# Altium PCB gateway2.PcbDoc
Units mm, origin at the board's own origin, x right, y up, seen from the top; angles counter-clockwise.
Board outline 61 x 52.5 mm, 2 copper layers (Top Layer, Bottom Layer); 28 components, 18 nets, 87 pads, 0 vias.
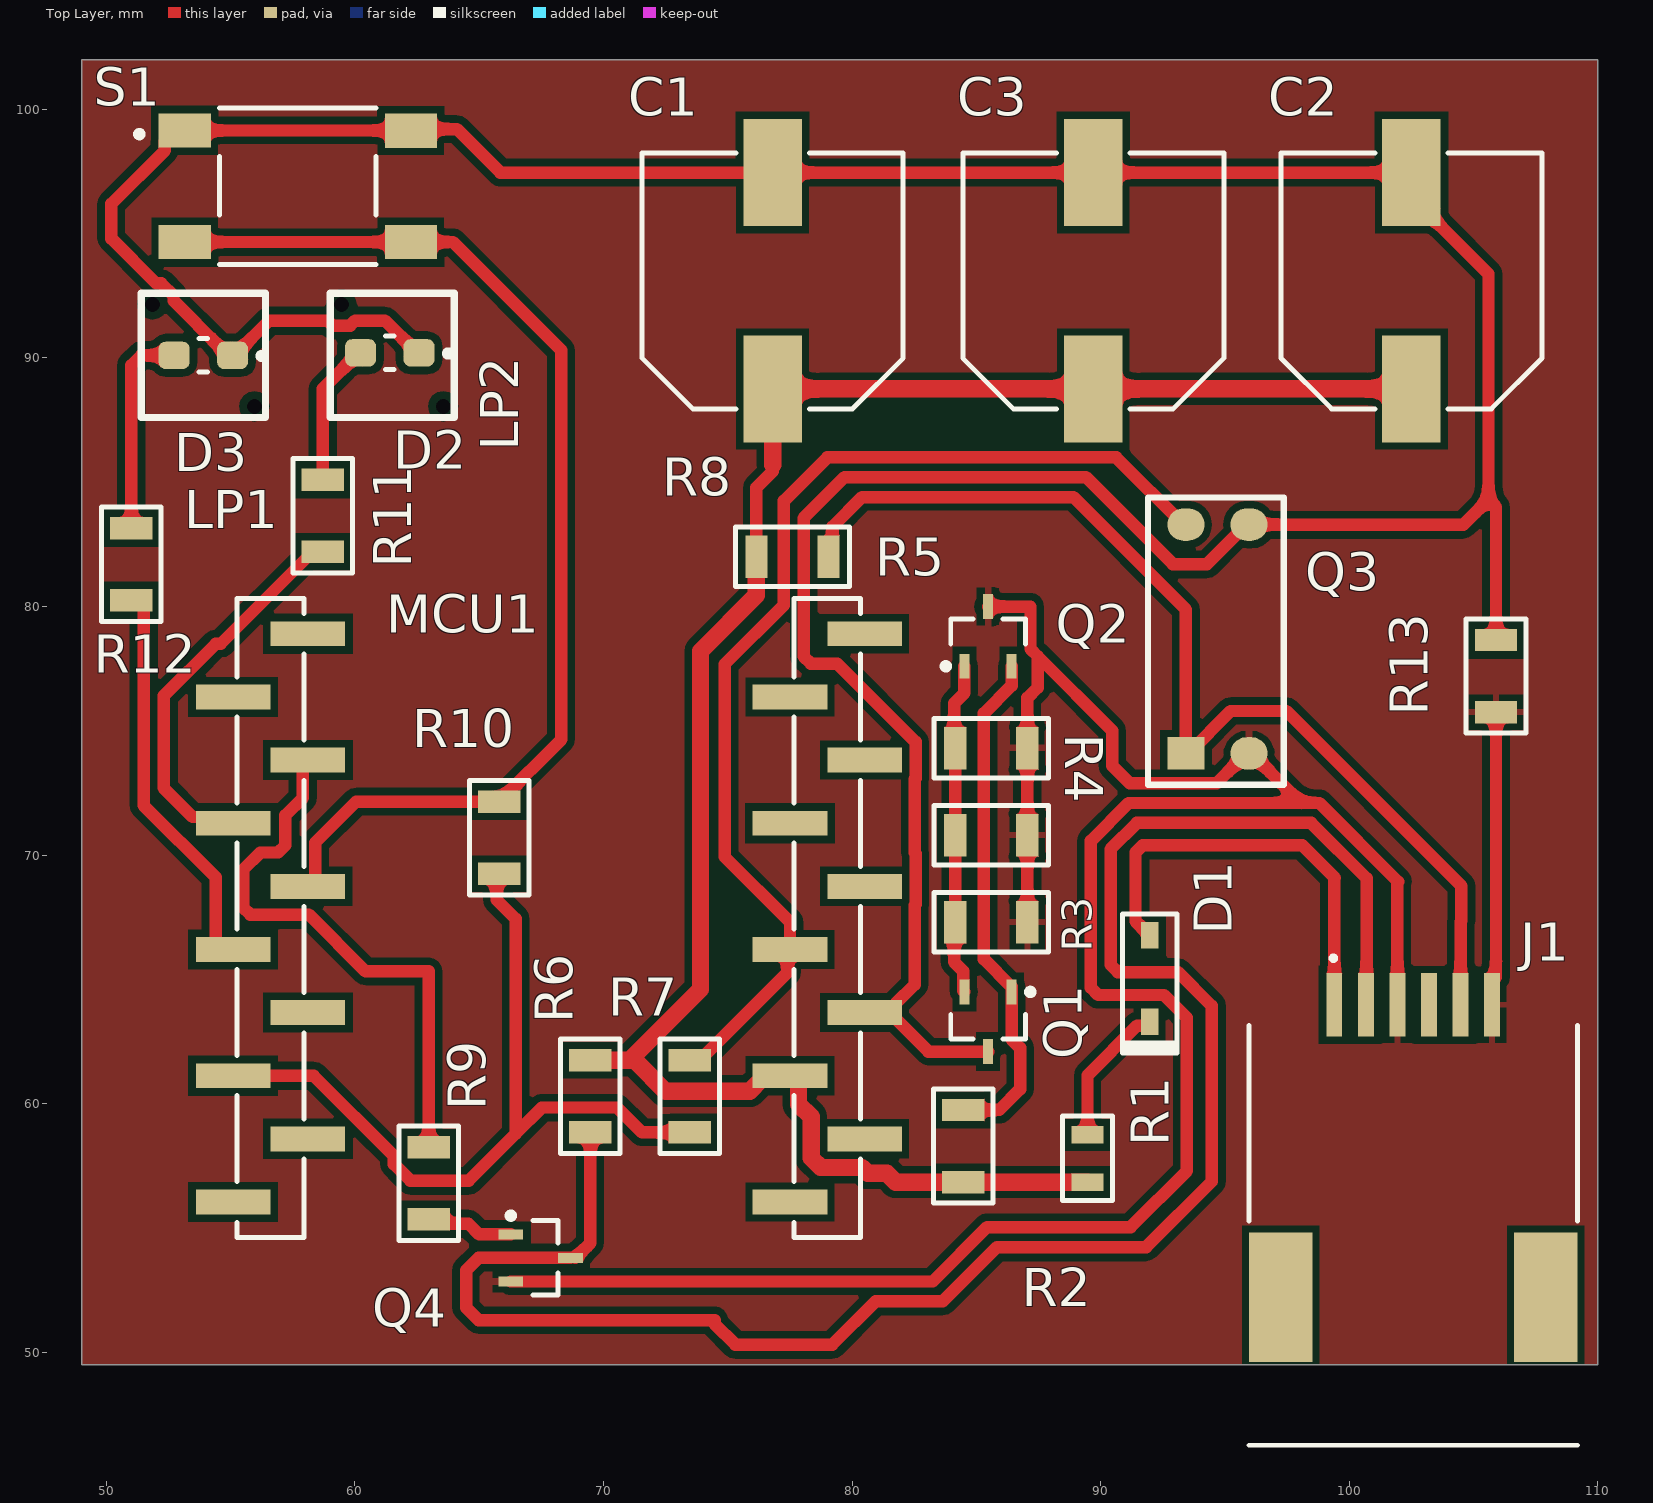
[diagram p0: Top Layer view]
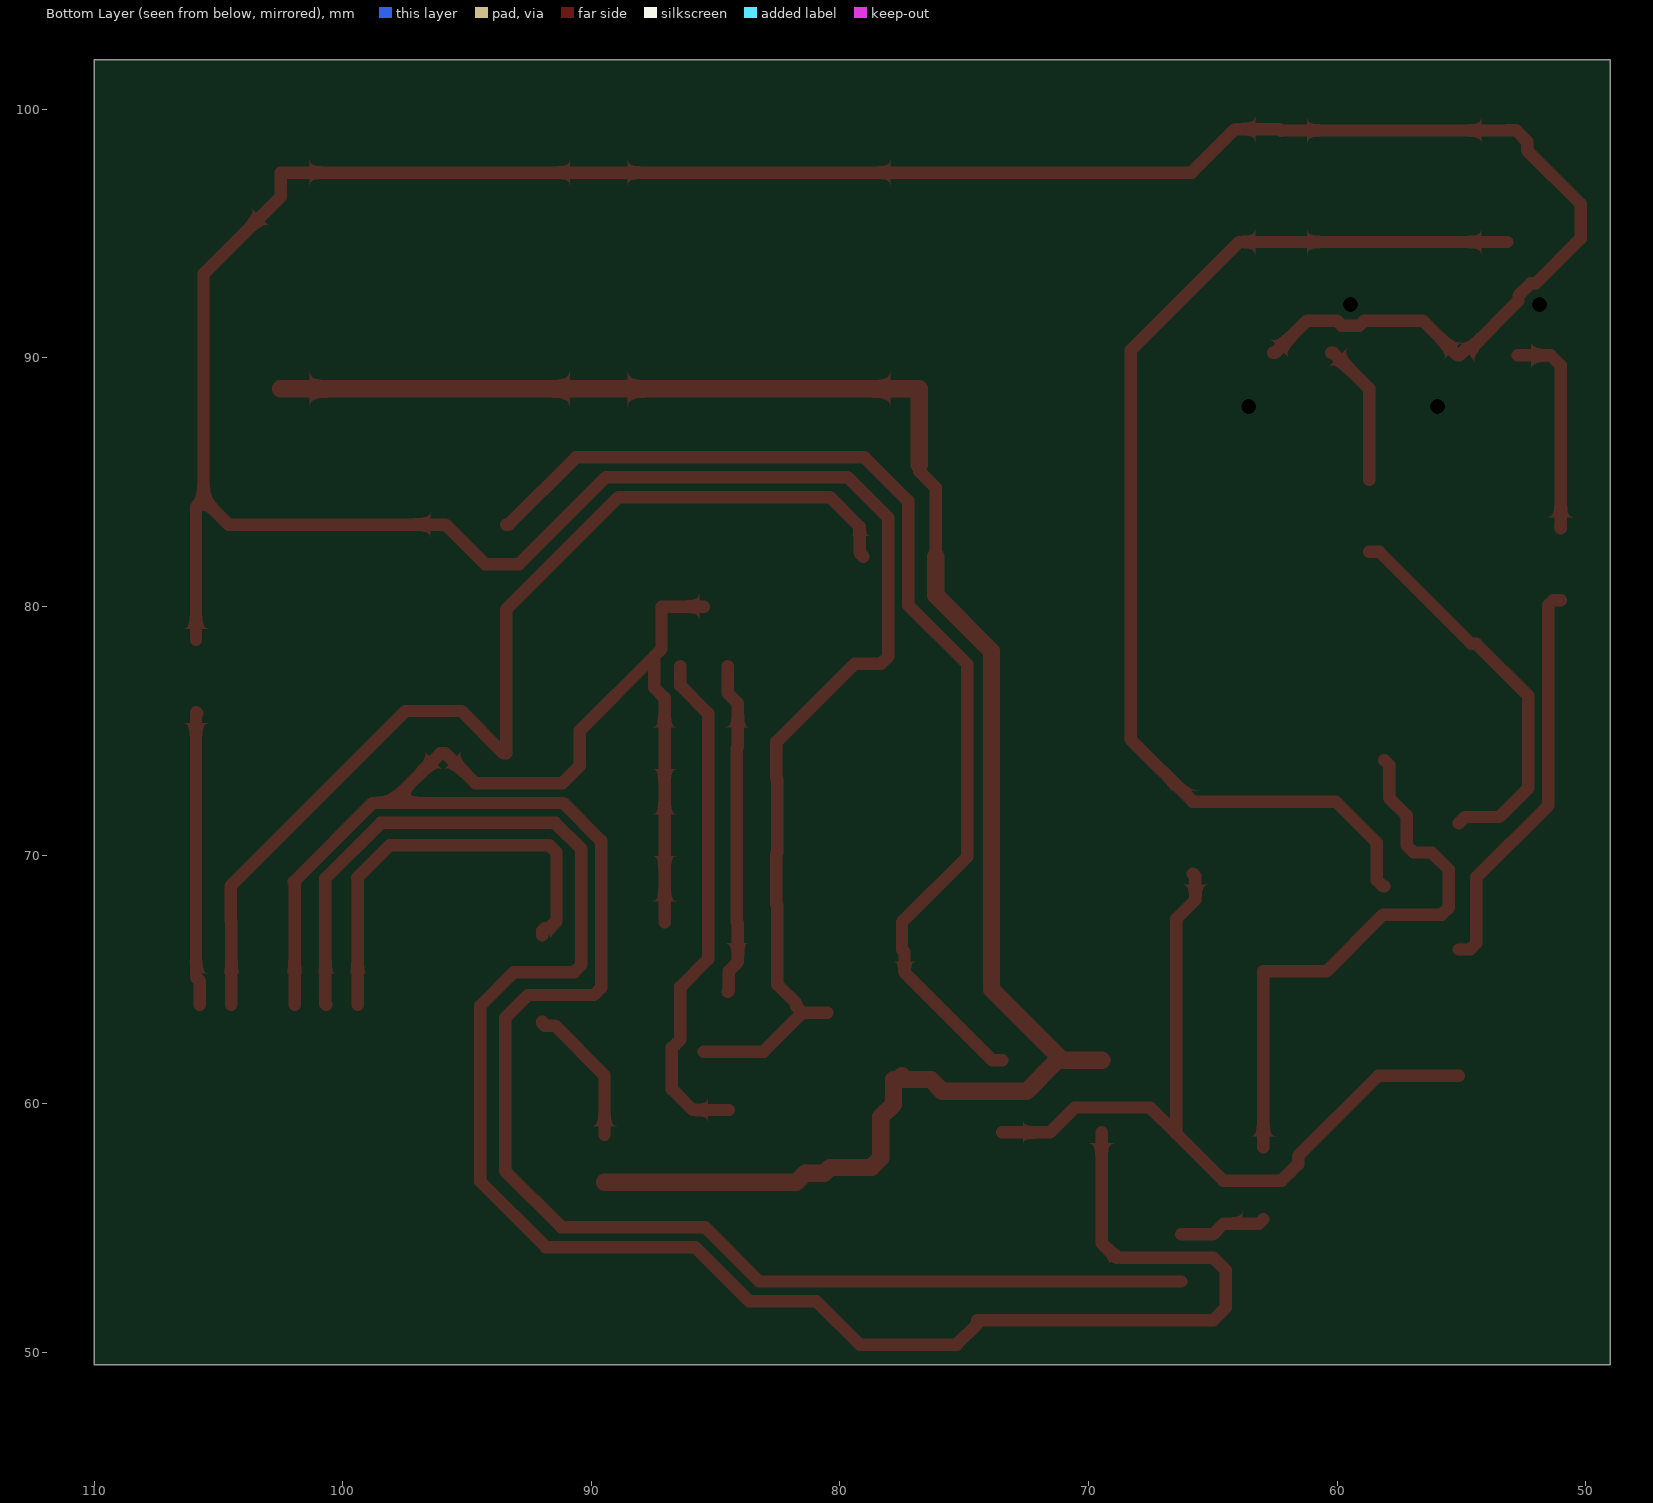
[diagram p1: Bottom Layer view, seen from below]

## Layer stack, top to bottom
Top Solder: solder mask 0.0102, Solder Resist, Dk 3.5
Top Layer: signal copper 0.0356
Dielectric 1: dielectric 0.32, FR-4, Dk 4.8
Bottom Layer: signal copper 0.0356
Bottom Solder: solder mask 0.0102, Solder Resist, Dk 3.5

## Board outline
49,49.5 49,102 110,102 110,49.5

## Design rules (kind name [scope] priority, off if disabled: settings)
Clearance [All] p1: gap=0.3 ignorepadtopadclearanceinfootprint=FALSE
PolygonConnect [All] p1: connectstyle=Relief reliefconductorwidth=0.254 reliefentries=4 polygonreliefangle="90 Angle" airgapwidth=0.254
RoutingVias [All] p1: holewidth=0.711 width=1.27 viastyle="Through Hole" minholewidth=0.711 minwidth=1.27 maxholewidth=0.711 maxwidth=1.27
SilkToSolderMaskClearance [IsPad] p1: minsilkscreentomaskgap=0.1 clearancetoexposedcopper=TRUE
SolderMaskExpansion [All] p1: expansion=0.102 istentingtop=FALSE
Width [All] p1: maxlimit=1 minlimit=0.25 preferedwidth=0.5
29 further rules are at their usual default settings.

## Components (designator, comment, footprint, x,y, rotation, side; value= is the part's Value field where it differs from the comment)
C1 "1800uF_6V3" CAPAE109103X105M_680uF 76.8,93.1 r90 top value=1800uF
C2 "1800uF_6V3" CAPAE109103X105M_680uF 102.5,93.1 r90 top value=1800uF
C3 "680uF_16V" CAPAE109103X105M_680uF 89.7,93.1 r90 top value=680uF
D1 "Schottky_SOD123" Diode_SOD-123 91.967,65.032 r270 top
D2 "red led" Kingbright_KPT-2012EC_0 61.4,90.2 r180 top
D3 "LED_green" Kingbright_KPT-2012EC_0 53.9,90.1 r180 top
J1 "RJ11_jack_6P6C" 44144-0005 102.57,63.975 r0 top
LP1 "VLP-350-R" VLP-350-R 61.5,90.1 r0 top
LP2 "VLP-350-R" VLP-350-R 53.9,90.1 r180 top
MCU1 "ESP32-MINI" PINHEADERS_SMD_10 61.6,67.57 r0 top
Q1 "NPN_MMBT100" SOT95P245X110-3N 85.467,63.292 r270 top
Q2 "NPN_MMBT100" SOT95P245X110-3N 85.467,78.792 r90 top
Q3 "Optocoupler_FOD817_SMD" FOD814_DIPSMD 95.967,74.092 r180 top
Q4 "N-channel_SOT-23" SOT95P237X110-3N 67.467,53.792 r0 top
R1 "Ptc200m_0805" R0805 89.467,57.792 r270 top value=0.2
R2 "R1k2_1206" R1206 84.467,58.292 r90 top value=1k2
R3 "R3_1206" R1206 85.6,67.3 r180 top value=3
R4 "R3_1206" R1206 85.6,70.8 r180 top value=3
R5 "R3_1206" R1206 85.6,74.3 r180 top value=3
R6 "R1k_1206" R1206 69.467,60.292 r90 top value=1k
R7 "R10k_1206" R1206 73.467,60.292 r270 top value=10k
R8 "R1k2_1206" R1206 77.6,82 r180 top value=1k2
R9 "R1k2_1206" R1206 62.967,56.792 r270 top value=1k2
R10 "R10k_1206" R1206 65.8,70.7 r270 top value=10k
R11 "R62_1206" R1206 58.7,83.65 r270 top value=62
R12 "R62_1206" R1206 51,81.7 r270 top value=62
R13 "R0_1206" R1206 105.9,77.2 r90 top value=0
S1 "FSM2JSMAA_Button" FP-FSM2JSMAA-MFG 57.7,96.9 r90 top

## Footprints (in the part's own frame and the unit in brackets; to place one, negate y for a bottom-side part, rotate by r counter-clockwise, add the part's x,y. Pads: shape width x height; smd on the part's side, far side on the other; paste and mask are expansions set on the pad)
44144-0005 [mm]
  rect 0.64x2.54 smd: 1(-3.175,0) 2(-1.905,0) 3(-0.635,0) 4(0.635,0) 5(1.905,0) 6(3.175,0)
  rect 2.54x5.21 smd: 7(-5.33,-11.775) 8(5.33,-11.775)
  silkscreen extent -6.61,-17.72 6.61,1.97, body extent -6.6,-17.4 6.6,0.99, height 11.75
CAPAE109103X105M_680uF [mm] "Aluminum Electrolytic Capacitor, Body 10,25x10,30x10,50mm, IPC Low Density"
  rect 4.3x2.35 smd: 1(-4.35,0) 2(4.35,0)
  silkscreen extent -5.15,-5.25 5.15,5.25, body extent -5.43,-5.25 5.43,5.25, height 10.5
Diode_SOD-123 [mm]
  rect 1.05x0.7 smd: A(-1.74,0) K(1.74,0)
  silkscreen extent -2.6,-1.1 3,1.1, body extent -1.95,-0.9 1.95,0.9, height 1.18
FOD814_DIPSMD [mm]
  rect 1.5x1.3 smd: 1(2.54,0)
  oval 1.5x1.3 smd: 2(0,0) 3(0,-9.2) 4(2.54,-9.2)
  silkscreen extent -1.4,-10.29 4.06,1.27, body extent -0.99,-9.6 3.59,0.4, height 3.86
FP-FSM2JSMAA-MFG [mm]
  rect 1.38x2.1 smd paste+0 mask+0: 1(2.25,4.55) 2(-2.24,4.55) 3(2.24,-4.55) 4(-2.24,-4.55)
  silkscreen extent -3.15,-3.15 3.15,6.5, body extent -3.25,-5.7 3.25,5.7, height 0.25
Kingbright_KPT-2012EC_0 [mm]
  rrect50% 1.25x1.1 smd paste+0 mask+0: 1(-1.175,0) 2(1.175,0)
  silkscreen extent -2.48,-0.67 0.18,0.67, body extent -1.9,-0.77 1.9,0.77, height 0.25
PINHEADERS_SMD_10 [mm] "Pin Header, pitch 2.54 mm, SMD, Vertical, single row, 8p"
  rect 3x1 smd: 1(-3.5,11.33) 2(-6.5,8.79) 3(-3.5,6.25) 4(-6.5,3.71) 5(-3.5,1.17) 6(-6.5,-1.37) 7(-3.5,-3.91) 8(-6.5,-6.45) 9(-3.5,-8.99) 10(-6.5,-11.53) 11(15.9,-11.53) 12(18.9,-8.99) 13(15.9,-6.45) 14(18.9,-3.91) 15(15.9,-1.37) 16(18.9,1.17) 17(15.9,3.71) 18(18.9,6.25) 19(15.9,8.79) 20(18.9,11.33)
  silkscreen extent -6.34,-12.95 18.75,12.75, body extent -9.38,-21.6 21.78,18.4, height 16.49
R0805 [mm]
  rect 0.7x1.3 smd: 1(-0.95,0) 2(0.95,0)
  silkscreen extent -1.7,-1 1.7,1, body extent -1,-0.63 1,0.62, height 0.61
R1206 [mm]
  rect 0.9x1.7 smd: 1(-1.45,0) 2(1.45,0)
  silkscreen extent -2.3,-1.2 2.3,1.2, body extent -1.6,-0.8 1.6,0.8, height 0.61
SOT95P237X110-3N [mm] "SOT23, 3-Leads, Body 2,92x2,37mm, Pitch 0,95mm, IPC Medium Density"
  rect 1x0.4 smd: 1(1.2,0) 2(-1.2,0.95) 3(-1.2,-0.95)
  silkscreen extent -1.32,-1.5 0.7,1.82, body extent -1.32,-1.52 1.32,1.52, height 1.1
SOT95P245X110-3N [mm] "SOT23, 3-Leads, Body 2,90x2,45mm, Pitch 0,95mm, IPC Medium Density"
  rect 1x0.4 smd: 1(-1.2,-0.95) 2(-1.2,0.95) 3(1.2,0)
  silkscreen extent -1.32,-1.5 0.7,1.83, body extent -1.3,-1.5 1.3,1.5, height 1.1
VLP-350-R [mm]
  round 0 hole 0.6 unplated: 4(-2.05,2.05) 5(2.05,-2.05)
  silkscreen extent -2.5,-2.5 2.5,2.5, body extent -2.35,-2.35 2.35,2.35, height 10.03

## Part data
C1 C2: "SMD Aluminium Electrolytic Capacitor, Radial Can, 1800 µF, 10 V, 0.092 ohm, TRV Series", Capacitance=1.8mF, Manufacturer=Panasonic, Manufacturer Part Number=EEE-FN0J182UV, Supplier Part Number 1=667-EEE-FN0J182UV, Voltage Rating=10V, Category="Aluminum Electrolytic Capacitors", Mount="Surface Mount", Supplier 1=Mouser, Supplier Unit Price 1=€0.98708
C3: "Aluminum Electrolytic Capacitors - SMD LOW ESR ELECTROLYTIC CAPACITORS", Case/Package=Radial, Manufacturer=Rubycon, Manufacturer Part Number=16TZV680M10X10.5, Supplier Part Number 1=232-16TZV680M10X10.5, Voltage Rating=10V, Category="Aluminum Electrolytic Capacitors", Mount="Surface Mount", Supplier 1=Mouser, Supplier Unit Price 1=€0.68594
D1: "Schottky Rectifier, 20 V, 500 mA, Single, SOD-123, 2 Pins, 320 mV", Forward Current=500mA, Forward Voltage=320mV, Manufacturer=STMicroelectronics, Manufacturer Part Number=STPS0520Z, Max Reverse Voltage (DC)=20V, Peak Non-Repetitive Surge Current=5.5A, Supplier Part Number 1=511-STPS0520Z, Category="Rectifier Diodes", Mount="Surface Mount", Output Current=500mA, Supplier 1=Mouser, Supplier Unit Price 1=€0.21607
D2: library part KPT-2012EC, "KPT-2012EC -  LED, Low Power, Red, SMD, 0805 [2012 Metric], 30 mA, 2 V, 617 nm", Case/Package=0805, Color=Red, Forward Current=20mA, Forward Voltage=1.85V, Manufacturer=Kingbright, Manufacturer Part Number=AP2012SRCPRV, Supplier Part Number 1=604-AP2012SRCPRV, Category=LEDs, Illumination Color=Red, Mount="Surface Mount", Supplier 1=Mouser
D3: "Standard LEDs - SMD GRN WATER CLEAR 0805", Case/Package=0805, Color=Green, Forward Current=20mA, Forward Voltage=2.1V, Manufacturer=Kingbright, Manufacturer Part Number=AP2012MGC, Supplier Part Number 1=604-AP2012MGC, Category=LEDs, Supplier 1=Mouser
J1: "Modular Connector, RJ11 Jack, 1 x 1 (Port), 6P6C, Cat3, Surface Mount", Manufacturer=Molex, Manufacturer Part Number=44144-0005, Supplier Part Number 1=538-44144-0005, Category="Modular / Ethernet Connectors", Gender=Female, Mount="Surface Mount", Supplier 1=Mouser, Supplier Packaging 1="Cut Tape", Supplier Unit Price 1=€1.14, Termination=SMD/SMT
LP1 LP2: "LIGHT PIPE, SINGLE, ROUND, PCB", Manufacturer=BIVAR, Manufacturer Part Number=VLP-350-R
MCU1: "LilyGO TTGO T7 Mini32 V1.4 ESP32-WROVER", Manufacturer Part Number=10129380-910002ALF, Supplier Part Number 1=649-1012938091002ALF, ComponentLink1Description=Manufacturer, ComponentLink1URL=https://www.tinytronics.nl/shop/nl/platforms/ttgo/lilygo-ttgo-t7-mini32-v1.4-esp32-wrover, Supplier 1=Mouser, Supplier Unit Price 1=€0.23406
Q1 Q2: "Bipolar (BJT) Single Transistor, NPN, 45 V, 500 mA, 350 mW, SOT-23, Surface Mount", Collector Emitter Voltage (VCEO)=45V, Emitter Base Voltage (VEBO)=6V, Manufacturer="ON Semiconductor / Fairchild", Manufacturer Part Number=MMBT100, Max Collector Current=500mA, Max Frequency=1MHz, Max Power Dissipation=350mW, Supplier Part Number 1=512-MMBT100, Category=BJTs, hFE Min=100, Max Breakdown Voltage=45V, Mount="Surface Mount", Polarity=NPN, Power Dissipation=350mW, Supplier 1=Mouser, Supplier Unit Price 1=€0.15259, Voltage Rating (DC)=45V
Q3: "Optocoupler, Transistor Output, 1 Channel, Surface Mount DIP, 4 Pins, 50 mA, 5 kV, 200 %", Case/Package=SMD/SMT, Forward Voltage=1.4V, Manufacturer="ON Semiconductor / Fairchild", Manufacturer Part Number=FOD817C3SD, Max Power Dissipation=200mW, Supplier Part Number 1=512-FOD817C3SD, Category=Optocouplers, Mount="Surface Mount", Supplier 1=Mouser, Supplier Unit Price 1=€0.45665
Q4: "Power MOSFET, N Channel, 60 V, 260 mA, 1 ohm, SOT-23, Surface Mount", Case/Package=SOT-23-3, Manufacturer="ON Semiconductor", Manufacturer Part Number=NTR5103NT1G, Max Power Dissipation=300mW, Supplier Part Number 1=863-NTR5103NT1G, Category=MOSFETs, FET Type="1 N-Channel", Mount="Surface Mount", Supplier 1=Mouser, Supplier Unit Price 1=€0.14925
R1: "Thermistor, PTC, SMD, 0805, 0.2 OHM", Case Code (Imperial)=0805, Case Code (Metric)=2012, Hold Current=500mA, Manufacturer=Murata, Manufacturer Part Number=PRG21BC0R2MM1RA, Resistance=200mR, Supplier Part Number 1=81-PRG21BC0R2MM1RA, Tolerance=20%, Case/Package=0805, Category="PTC Resettable Fuses", Mount="Surface Mount", Supplier 1=Mouser, Supplier Unit Price 1=€0.44997, Termination=SMD/SMT
R2 R8 R9: "Thick Film Resistors - SMD 1206 1.2Kohms 1% AEC-Q200", Case Code (Imperial)=1206, Manufacturer=Panasonic, Manufacturer Part Number=ERJ-8ENF1201V, Max Power Dissipation=250mW, Resistance=1.2kR, Supplier Part Number 1=667-ERJ-8ENF1201V, Tolerance=1%, Case/Package=1206, Category="Chip SMD Resistors", Mount="Surface Mount", Power Rating=250mW, Supplier 1=Mouser, Supplier Unit Price 1=€0.08359
R3 R4 R5: "Current Sense Resistors - SMD 1206 3.0ohm 1% Curr Sense AEC-Q200", Case Code (Imperial)=1206, Case Code (Metric)=3216, Manufacturer=Panasonic, Manufacturer Part Number=ERJ8RQF3R0V, Power Rating=250mW, Supplier Part Number 1=667-ERJ-8RQF3R0V, Tolerance=1%, Case/Package=1206, Category="Chip SMD Resistors", Mount="Surface Mount", Supplier 1=Mouser, Supplier Unit Price 1=€0.45139
R6: "Thick Film Resistors - SMD 1206 1Kohms 1% Tol AEC-Q200", Case Code (Imperial)=1206, Case Code (Metric)=3216, Manufacturer=Panasonic, Manufacturer Part Number=ERJ-8ENF1001V, Max Power Dissipation=250mW, Supplier Part Number 1=667-ERJ-8ENF1001V, Tolerance=1%, Case/Package=1206, Category="Chip SMD Resistors", Mount="Surface Mount", Power Rating=250mW, Supplier 1=Mouser, Supplier Unit Price 1=€0.01325
R7 R10: "Thick Film Resistors - SMD 1206 10Kohms 1% AEC-Q200", Case Code (Imperial)=1206, Case Code (Metric)=3216, Manufacturer=Panasonic, Manufacturer Part Number=ERJ-8ENF1002V, Max Power Dissipation=250mW, Supplier Part Number 1=667-ERJ-8ENF1002V, Tolerance=1%, Case/Package=1206, Category="Chip SMD Resistors", Mount="Surface Mount", Power Rating=250mW, Supplier 1=Mouser, Supplier Unit Price 1=€0.01214
R11 R12: "Thick Film Resistors - SMD 1206 62ohms 1% AEC-Q200", Case Code (Imperial)=1206, Case Code (Metric)=3216, Manufacturer=Panasonic, Manufacturer Part Number=ERJ-8ENF62R0V, Max Power Dissipation=250mW, Supplier Part Number 1=667-ERJ-8ENF62R0V, Tolerance=1%, Case/Package=1206, Category="Chip SMD Resistors", Mount="Surface Mount", Supplier 1=Mouser, Supplier Unit Price 1=€0.00512
S1: "Tactile Switch, FSMJSM Series, Top Actuated, Surface Mount, Round Button, 260 gf, 50mA at 24VDC", Case/Package=SMD/SMT, Manufacturer="TE Connectivity", Manufacturer Part Number=FSM2JSMAA, Supplier Part Number 1=506-2-1437565-8, Voltage Rating (DC)=24V, Category="Pushbutton Switches", Connector Type=SMD/SMT, Mount="Surface Mount", Supplier 1=Mouser, Supplier Unit Price 1=€0.13022

## Nets (pads, with @x,y where several pads share a name; then routed paths per layer and width w, separated by ;. In a path a pad name is that pad's centre, name@x,y a point inside that pad or via, vN(x,y) a via of type N, cw(c..) or ccw(c..) an arc to the next point about the centre after c; other vN are vias at no path point)
+3V3: MCU1.8 R7.2 R10.2 | length 32.8
  Top Layer w0.5: MCU1.8 58.338,61.12 61.567,57.891 61.567,57.564 61.889,57.242 62.231,56.9 64.575,56.9 66.467,58.792 ; R10.2 65.7,69.15 65.7,68.2 66.467,67.433 66.467,58.792 ; R7.2 71.545,58.842 70.545,59.842 67.517,59.842 66.467,58.792
+5: C1.1 C2.1 C3.1 MCU1.13 R1.2 R2.1 R6.2 R8.2 | length 78.9
  Top Layer w0.5: R8.2 76.15,84.784 76.8,85.434 76.8,85.7
  Top Layer w0.7: R6.2 69.867,61.742 71.042,61.742 73.9,64.6 73.9,78.2 76.15,80.45 R8.2 ; 71.348,61.642 72.49,60.5 75.88,60.5 76.35,60.97 76.85,60.97 MCU1.13@77.35,60.97 ; 76.8,85.7 C1.1 C3.1 C2.1 ; MCU1.13 MCU1.13@77.35,60.97 ; R1.2 R2.1 81.758,56.842 81.4,57.2 80.62,57.2 80.39,57.43 78.731,57.43 78.35,57.811 78.35,59.47 77.84,59.98 77.84,60.97 MCU1.13@77.35,60.97
Button: MCU1.5 R10.1 S1.2 S1.4 | length 46.1
  Top Layer w0.5: S1.2 S1.4 63.94,94.66 68.3,90.3 68.3,74.65 R10.1 60.05,72.15 58.4,70.5 58.4,68.99 58.15,68.74 MCU1.5
Data_req: MCU1.3 R9.1 | length 23
  Top Layer w0.5: MCU1.3 57.9,73.62 57.9,72.3 57.2,71.6 57.2,70.393 56.907,70.1 56.193,70.1 55.5,69.407 55.5,67.893 55.793,67.6 58.142,67.6 60.425,65.317 62.967,65.317 R9.1
DTR_SM: J1.2 Q4.1 R6.1 | length 77.9
  Top Layer w0.5: Q4.1 64.967,53.792 64.467,53.292 64.467,51.792 64.967,51.292 74.467,51.292 74.467,51.133 75.3,50.3 79.2,50.3 80.942,52.042 83.642,52.042 85.827,54.227 91.827,54.227 94.467,56.867 94.467,63.933 93.108,65.292 90.693,65.292 90.4,65.585 90.4,70.238 91.454,71.292 98.467,71.292 100.695,69.064 100.695,64.005 J1.2 ; Q4.1@68.867,53.792 69.467,54.392 R6.1
ESPGND: C1.2 C2.2 C3.2 D2.1 D3.1 MCU1.14 Q1.3 Q3.3 R13.2 S1.1 S1.3 | length 151
  Top Layer w0.5: D2.1 62.5,90.2 61.2,91.5 60.002,91.5 59.802,91.3 59.098,91.3 58.898,91.5 56.55,91.5 55.15,90.1 D3.1 54.79,90.385 54.615,90.385 52.7,92.3 52.7,92.502 52.202,93 52,93 50.2,94.8 50.2,96.2 52.35,98.35 52.35,98.71 52.79,99.15 S1.1 53.155,99.145 62.245,99.145 S1.3 62.31,99.2 64.1,99.2 65.85,97.45 76.595,97.45 C1.2 C3.2 C2.2 102.5,96.475 105.6,93.375 105.6,84.3 ; MCU1.14 MCU1.14@81.5,63.66 ; Q1.3 83.068,62.092 MCU1.14@81.5,63.66 ; R13.2 105.9,84 105.6,84.3 ; MCU1.14@81.5,63.66 81.75,63.91 81.75,64.018 82.517,64.785 82.517,67.979 82.55,68.012 82.55,70.05 82.517,70.083 82.517,73.059 82.55,73.092 82.55,74.548 79.398,77.7 78.343,77.7 78.05,77.993 78.05,83.55 79.7,85.2 89.4,85.2 92.9,81.7 94.275,81.7 95.867,83.292 Q3.3 104.592,83.292 105.6,84.3
GND: J1.3 J1.6 Q2.3 Q3.2 Q4.3 R3.1 R4.1 R5.1 R13.1 | length 106.2
  Top Layer w0.5: Q4.3 83.242,52.842 85.427,55.027 91.202,55.027 93.467,57.292 93.467,63.445 92.545,64.367 89.893,64.367 89.6,64.66 89.6,70.57 91.122,72.092 98.067,72.092 ; Q2.3 87.174,79.992 87.174,78.288 87.467,77.996 ; R3.1 R4.1 R5.1 87.05,76.319 87.467,76.736 87.467,77.996 ; J1.3 101.935,68.895 101.965,68.925 98.798,72.092 98.067,72.092 ; J1.6 105.745,64.925 105.9,65.08 R13.1 R13.1@105.845,75.695 ; 87.467,77.996 90.467,74.996 90.467,73.585 91.16,72.892 94.667,72.892 95.867,74.092 Q3.2 96.067,74.092 98.067,72.092
LED_GREEN: MCU1.6 R12.2 | length 16.2
  Top Layer w0.5: R12.2 51.3,80.25 51.5,80.05 51.5,72 54.4,69.1 54.4,66.45 54.65,66.2 MCU1.6
LED_RED: MCU1.4 R11.2 | length 15.9
  Top Layer w0.5: MCU1.4 54.85,71.53 53.47,71.53 52.3,72.7 52.3,76.4 54.4,78.5 54.6,78.5 58.3,82.2 R11.2
NetD1_1: D1.K R1.1 | length 5.8
  Top Layer w0.5: R1.1 89.467,61.137 91.467,63.137 91.867,63.137 91.967,63.237 D1.K
NetD1_2: D1.A J1.1 | length 17.5
  Top Layer w0.5: D1.A 91.967,66.947 91.867,67.047 91.693,67.047 91.4,67.34 91.4,70.107 91.693,70.4 98.1,70.4 99.425,69.075 99.395,69.045 J1.1
NetD2_2: D2.2 R11.1 | length 5.8
  Top Layer w0.5: R11.1 58.7,88.75 60.15,90.2 D2.2
NetD3_2: D3.2 R12.1 | length 8.5
  Top Layer w0.5: R12.1@51.025,83.175 R12.1 51,89.7 51.4,90.1 D3.2
NetQ1_1: Q1.1 Q2.2 R3.2 R4.2 R5.2 | length 13.5
  Top Layer w0.5: Q1.1 84.467,64.542 84.467,65.333 84.1,65.7 84.1,67.25 R3.2 R4.2 R5.2 84.1,74.35 84.1,76.1 84.517,76.517 Q2.2
NetQ1_2: Q1.2 Q2.1 R2.2 | length 20.7
  Top Layer w0.5: R2.2 85.917,59.742 86.76,60.585 86.76,62.242 86.417,62.585 Q1.2 86.417,64.692 85.3,65.809 85.3,75.7 86.417,76.817 Q2.1
NetQ4_2: Q4.2 R9.2 | length 3.5
  Top Layer w0.5: R9.2 63.142,55.167 64.567,55.167 64.992,54.742 Q4.2
Rx_ESP: MCU1.15 Q3.4 R7.1 | length 44.5
  Top Layer w0.5: R7.1 73.867,61.742 77.4,65.275 77.4,66.1 MCU1.15 77.5,67.3 74.876,69.924 74.876,77.676 77.25,80.05 77.25,84.25 79,86 90.619,86 93.327,83.292 Q3.4
Tx_SM: J1.5 Q3.1 R8.1 | length 43.1
  Top Layer w0.5: R8.1 79.205,82.155 79.205,83.205 80.4,84.4 88.9,84.4 93.427,79.873 Q3.1 93.527,74.092 95.227,75.792 97.467,75.792 104.505,68.754 104.505,67.345 104.475,67.315 J1.5
pads on no net: J1.4 J1.7 J1.8 LP1.4 LP1.5 LP2.4 LP2.5 MCU1.1 MCU1.2 MCU1.7 MCU1.9 MCU1.10 MCU1.11 MCU1.12 MCU1.16 MCU1.17 MCU1.18 MCU1.19 MCU1.20

## Polygon pours and split planes (outlines as drawn)
GND on Top Layer "GND_L01_P001" (solid, remove dead copper, pour order 1): 49,49.5 110,49.5 110,102 49,102